# Altium PCB pcad_lad04_2.PcbDoc
Units mil, origin at the board's own origin, x right, y up, seen from the top; angles counter-clockwise.
Board outline 2224.14 x 2250 mil, 2 copper layers (Top Layer, Top, Bottom Layer, Bottom); 5 components, 4 nets, 12 pads, 0 vias.
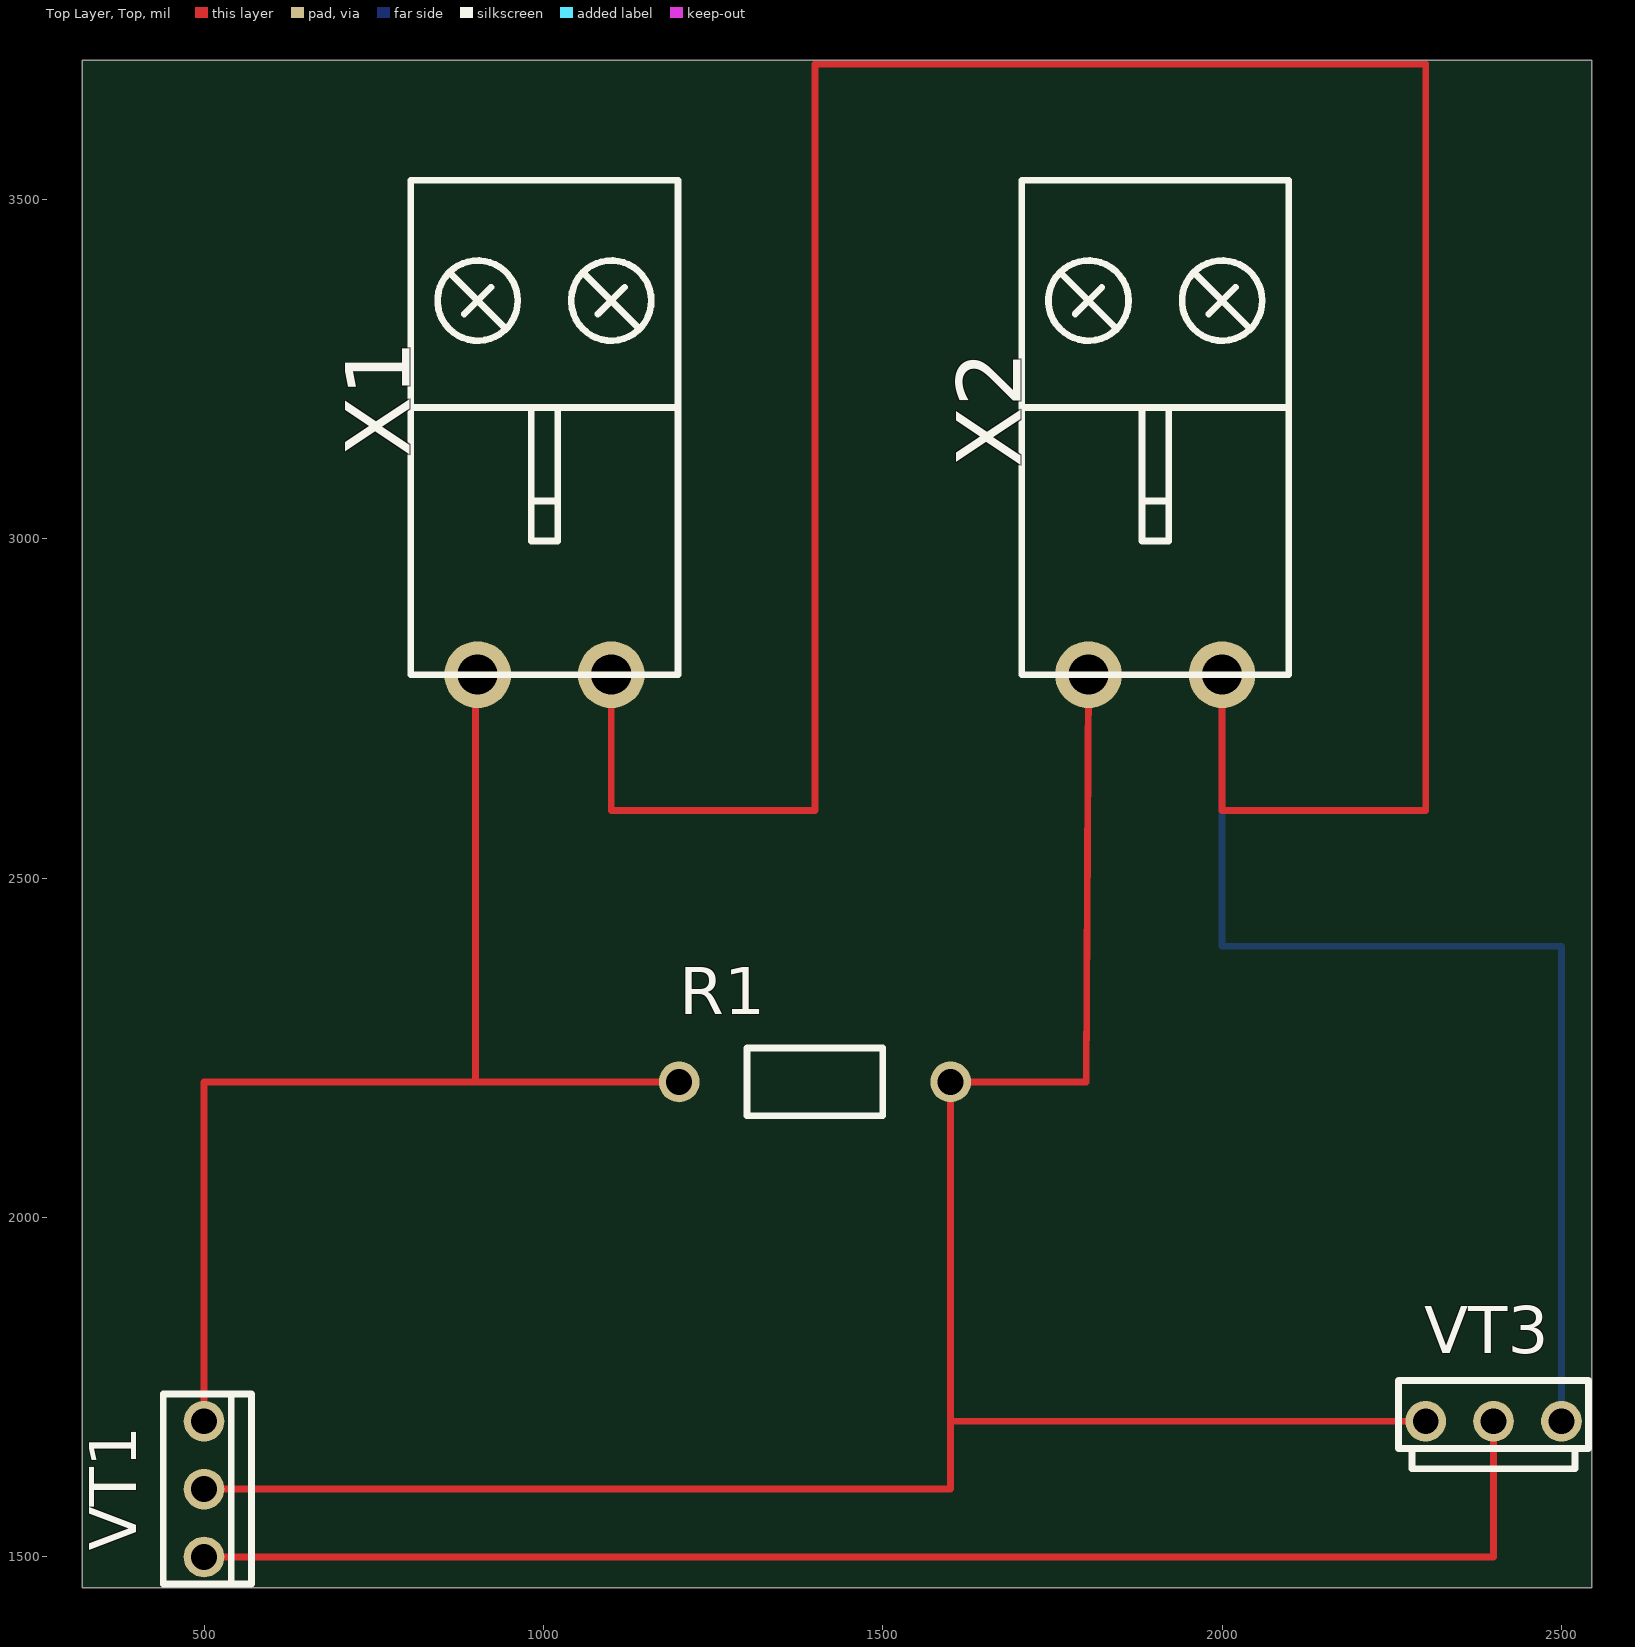
[diagram p0: Top Layer, Top view]
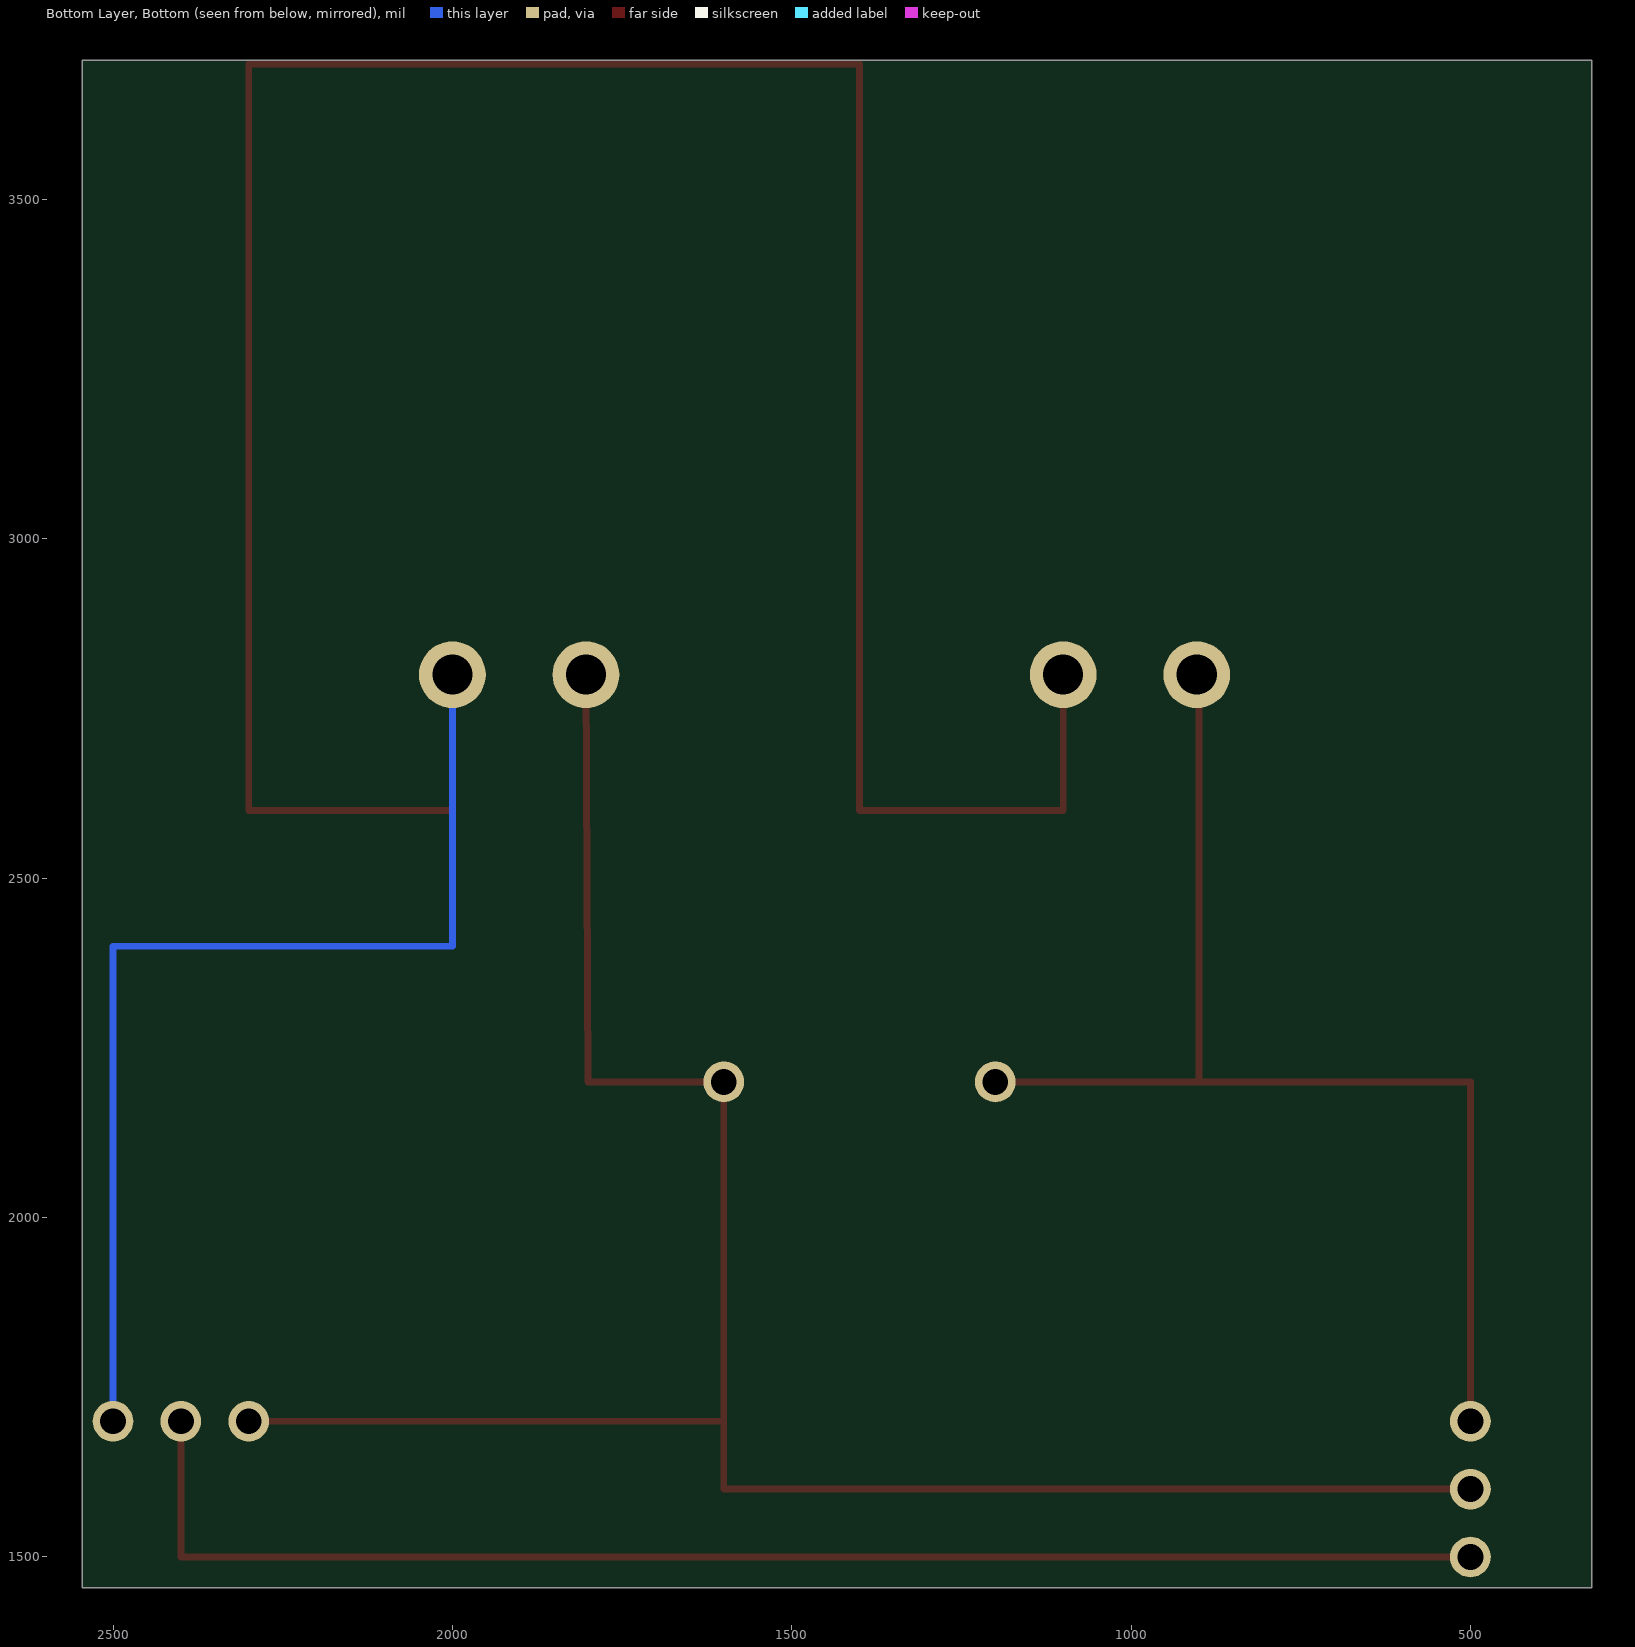
[diagram p1: Bottom Layer, Bottom view, seen from below]

## Layer stack, top to bottom
Top Solder, Top Mask: solder mask 0.4, Solder Resist, Dk 3.5
Top Layer, Top: signal copper 1.4
Dielectric 1: dielectric 12.6, FR-4, Dk 4.8
Bottom Layer, Bottom: signal copper 1.4
Bottom Solder, Bot Mask: solder mask 0.4, Solder Resist, Dk 3.5

## Board outline
320.86,1455 2545,1455 2545,3705 320.86,3705

## Design rules (kind name [scope] priority, off if disabled: settings)
Clearance [All] p1: gap=10 ignorepadtopadclearanceinfootprint=FALSE except(0: Arc-Hole Track-Hole SMDPad-Hole THPad-Hole Via-Hole Fill-Hole Poly-Hole Region-Hole Text-Hole; 12: Arc-Arc Arc-Track Arc-THPad Arc-Via Track-Track Track-THPad Track-Via THPad-THPad THPad-Via Via-Via)
PlaneClearance [All] p1: clearance=10
PolygonConnect [All] p1: connectstyle=Relief reliefconductorwidth=10 reliefentries=4 polygonreliefangle="90 Angle" airgapwidth=10
RoutingVias [All] p1: holewidth=28 width=50 viastyle="Through Hole" minholewidth=28 minwidth=50 maxholewidth=28 maxwidth=50
SolderMaskExpansion [All] p1: expansion=4
Width [All] p1: maxlimit=10 minlimit=10 preferedwidth=10
29 further rules are at their usual default settings.

## Components (designator, comment, footprint, x,y, rotation, side; value= is the part's Value field where it differs from the comment)
R1 "{Value}" RES400 1200,2200 r0 top
VT1 "{Value}" КТ315 500,1500 r90 top
VT3 "{Value}" КТ815 2300,1700 r0 top
X1 "" 2XR 1100,2800 r90 top
X2 "" 2XR 2000,2800 r90 top

## Footprints (in the part's own frame and the unit in brackets; to place one, negate y for a bottom-side part, rotate by r counter-clockwise, add the part's x,y. Pads: shape width x height; smd on the part's side, far side on the other; paste and mask are expansions set on the pad)
2XR [mm]
  round 2.5 hole 1.5: 1(0,0) 2(0,5)
  silkscreen extent 0,-2.5 18.5,7.5
RES400 [mil]
  round 60 hole 38: 1(0,0) 2(400,0)
  silkscreen extent 100,-50 300,50
КТ315 [mil]
  round 60 hole 38: 1(0,0) 2(100,0) 3(200,0)
  silkscreen extent -40,-70 240,60
КТ815 [mil]
  round 60 hole 38: 1(0,0) 2(100,0) 3(200,0)
  silkscreen extent -40,-70 240,60

## Nets (pads, with @x,y where several pads share a name; then routed paths per layer and width w, separated by ;. In a path a pad name is that pad's centre, name@x,y a point inside that pad or via, vN(x,y) a via of type N, cw(c..) or ccw(c..) an arc to the next point about the centre after c; other vN are vias at no path point)
BA: R1.2 VT1.2 VT3.1 X2.2 | length 3200
  Top Layer, Top w10: VT1.2 1600,1600 1600,1700 ; X2.2 1800,2200 R1.2 1600,1700 ; VT3.1 1600,1700
BA1: VT3.3 X1.1 X2.1 | length 5700
  Top Layer, Top w10: X1.1 1100,2600 1400,2600 1400,3700 2300,3700 2300,2600 2000,2600 X2.1
  Bottom Layer, Bottom w10: X2.1 2000,2400 2500,2400 VT3.3
NET00001: R1.1 VT1.3 X1.2 | length 1803.1
  Top Layer, Top w10: VT1.3 500,2200 900,2200 ; X1.2 900,2800 900,2200 ; R1.1 900,2200
NET00004: VT1.1 VT3.2 | length 2100
  Top Layer, Top w10: VT1.1 2400,1500 VT3.2